# Altium PCB atmg32.PcbDoc
Units mil, origin at the board's own origin, x right, y up, seen from the top; angles counter-clockwise.
Board outline 4460 x 2635 mil, 2 copper layers (Top Layer, Bottom Layer); 28 components, 42 nets, 134 pads, 32 vias.
Unrouted connection lines stored in the file: 2.
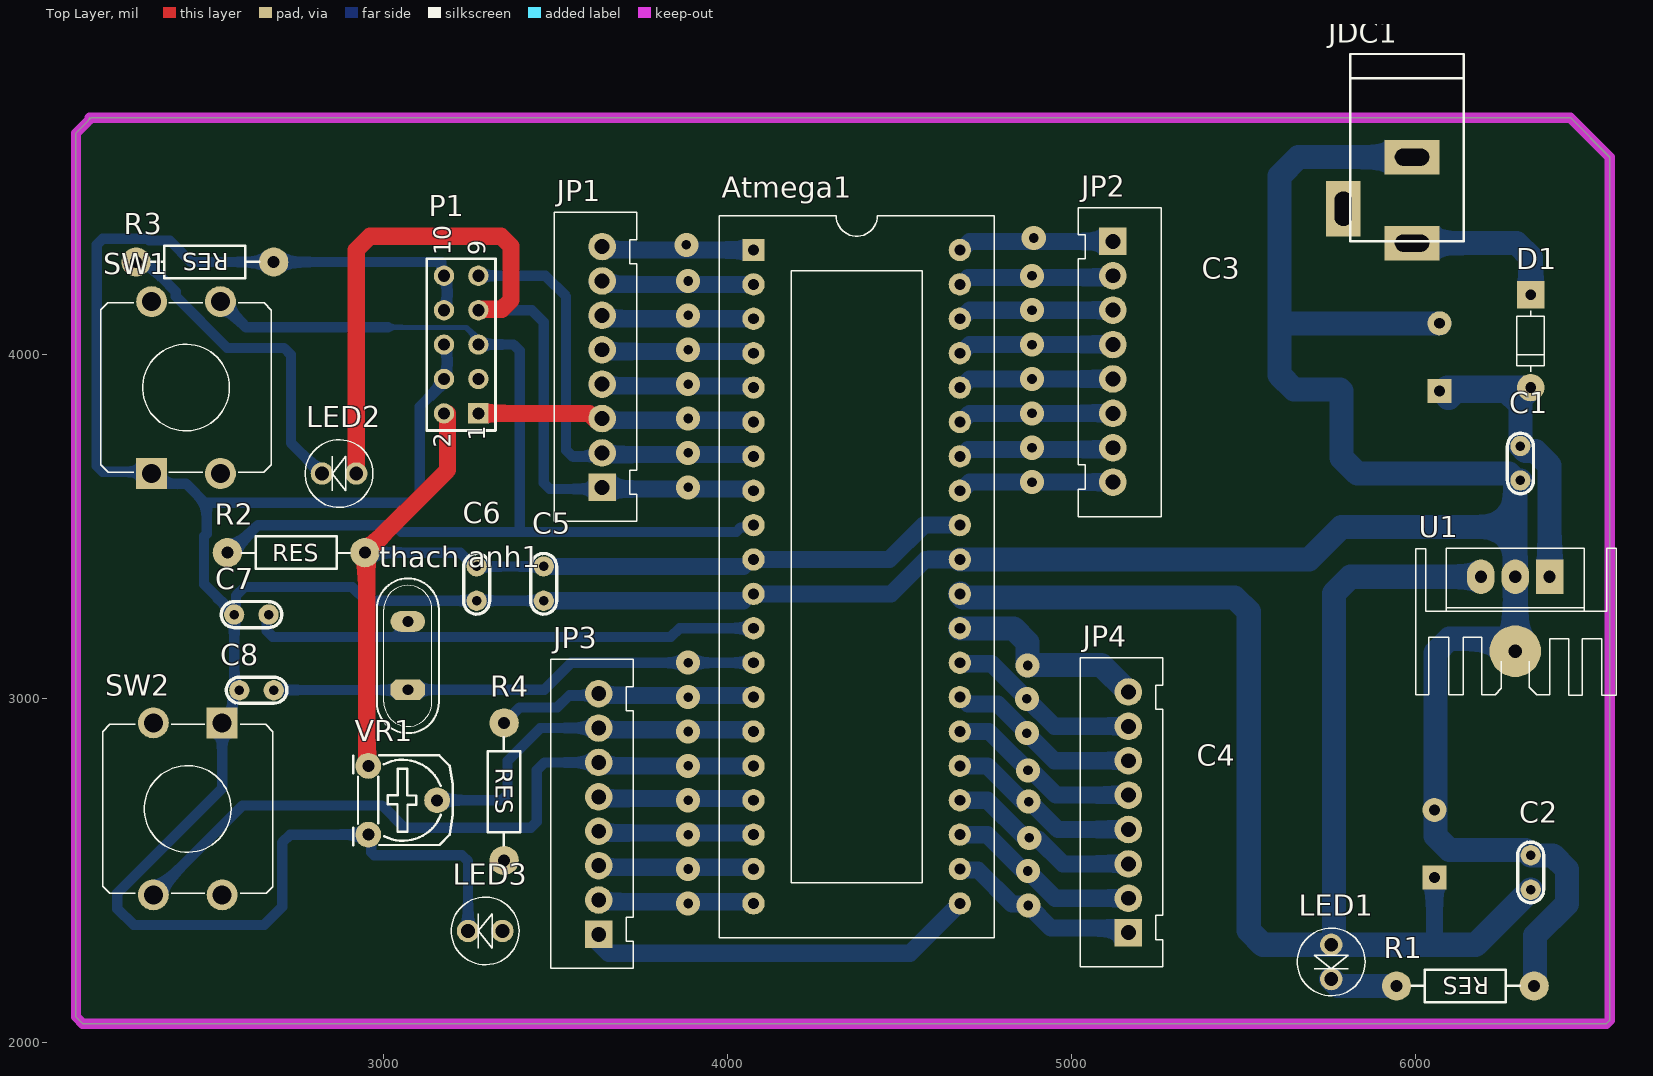
[diagram p0: Top Layer view]
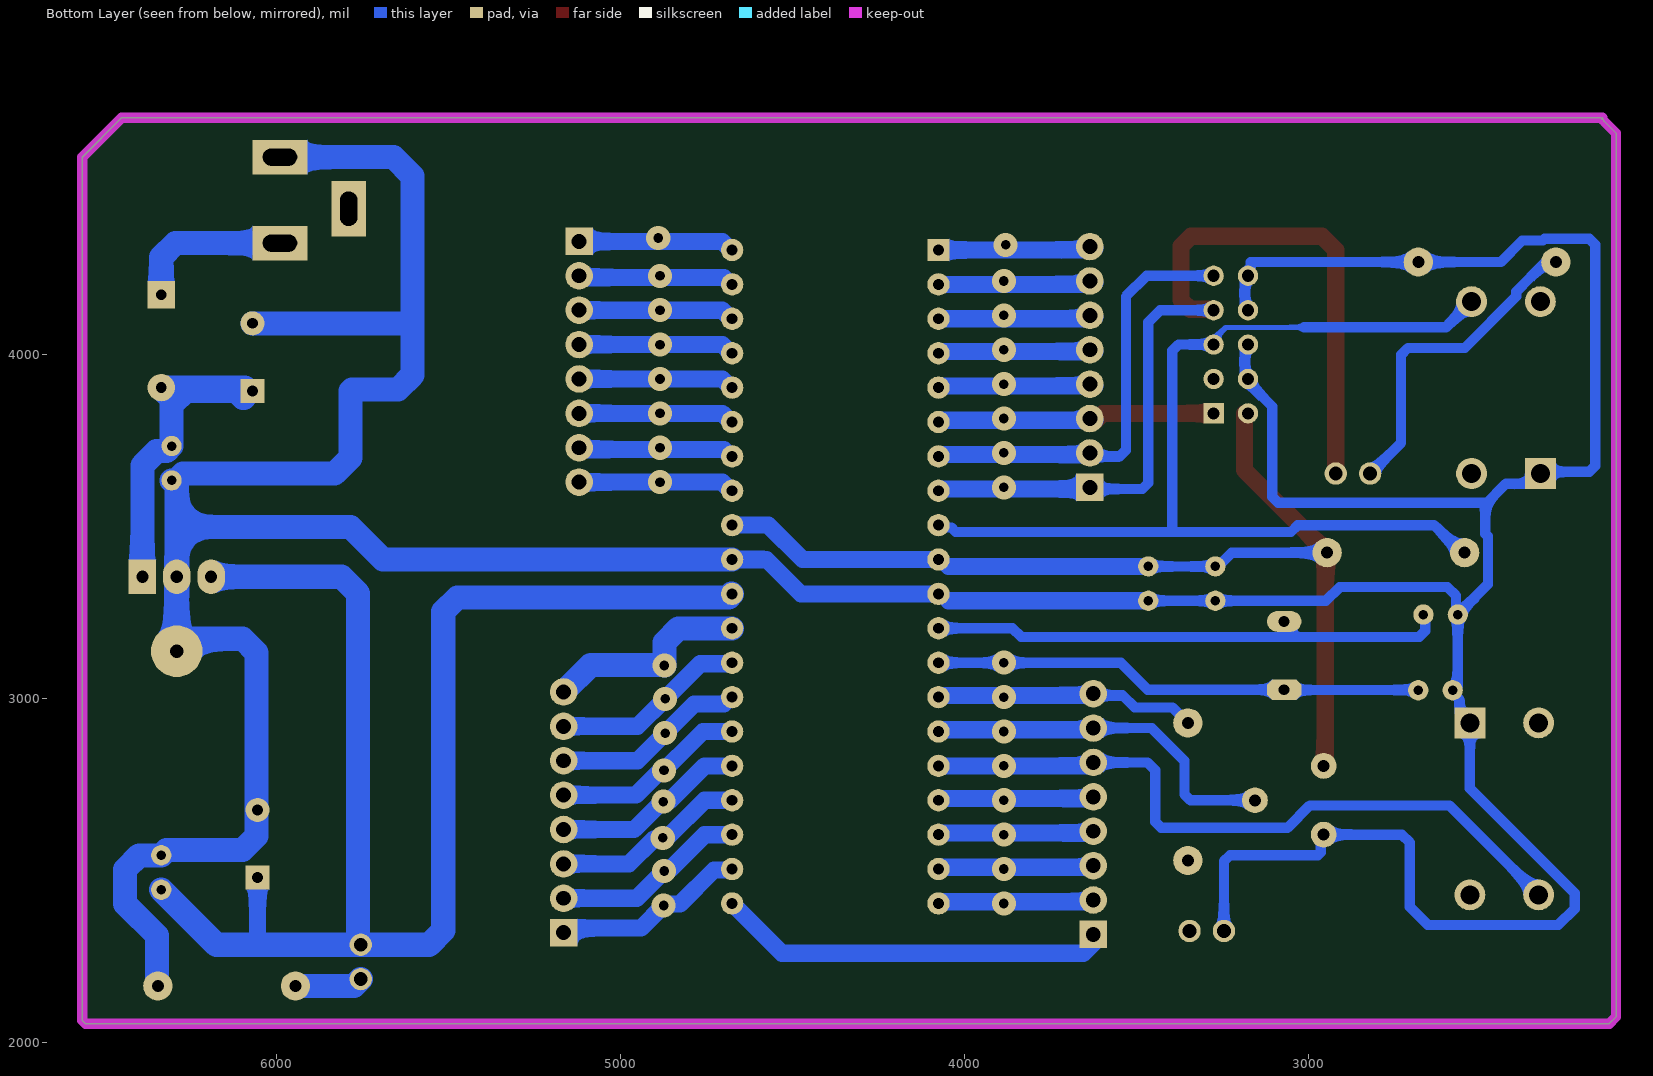
[diagram p1: Bottom Layer view, seen from below]
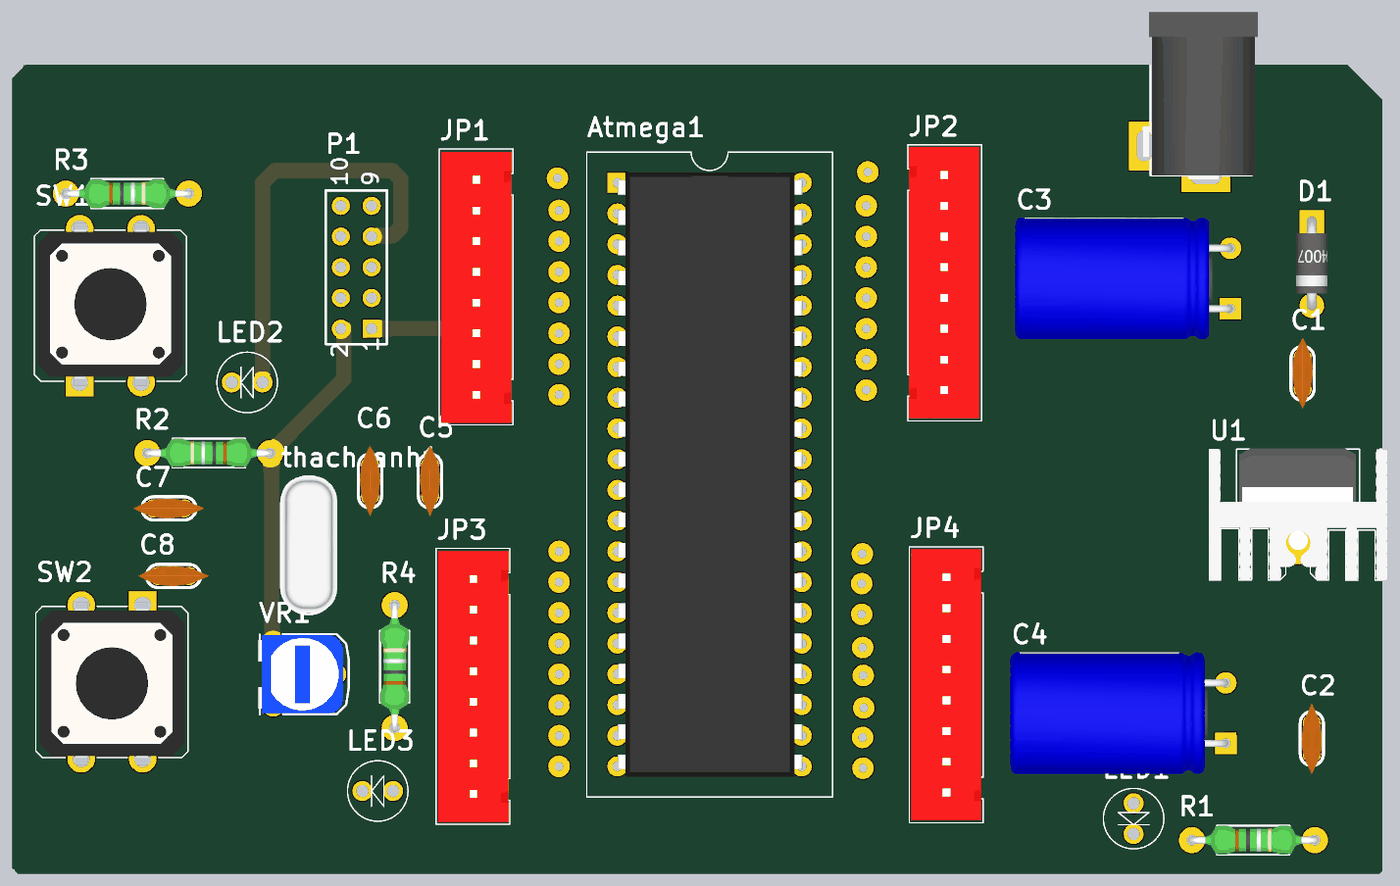
[diagram p2: 3D render of the assembled board from above, using the file's embedded part models]

## Layer stack, top to bottom
Top Solder: solder mask 0.4, Solder Resist, Dk 3.5
Top Layer: signal copper 1.4
Dielectric 1: dielectric 12.6, FR-4, Dk 4.8
Bottom Layer: signal copper 1.4
Bottom Solder: solder mask 0.4, Solder Resist, Dk 3.5

## Board outline
2105,2075 2125,2055 6555,2055 6565,2065 6565,4575 6450,4690 2150,4690 2145,4685 2145,4690 2140,4680 2105,4645

## Design rules (kind name [scope] priority, off if disabled: settings)
Clearance [All] p1: gap=10 ignorepadtopadclearanceinfootprint=FALSE except(0: Arc-Hole Track-Hole SMDPad-Hole THPad-Hole Via-Hole Fill-Hole Poly-Hole Region-Hole Text-Hole)
PolygonConnect [All] p1: connectstyle=Relief reliefconductorwidth=10 reliefentries=4 polygonreliefangle="90 Angle" airgapwidth=10
RoutingVias [All] p1: holewidth=28 width=50 viastyle="Through Hole" minholewidth=28 minwidth=50 maxholewidth=28 maxwidth=50
SolderMaskExpansion [All] p1: expansion=4 istentingtop=FALSE
Width [All] p1: maxlimit=70 minlimit=15 preferedwidth=50 toplayer_minwidth=30 bottomlayer_prefwidth=30 minimp=50.000000 maximp=50.000000 favimp=50.000000
30 further rules are at their usual default settings.

## Components (designator, comment, footprint, x,y, rotation, side; value= is the part's Value field where it differs from the comment)
Atmega1 "ATMEGA32A-PU" "DIP 40" 4075,4305 r270 top
C1 "104" CN0 6305,3685 r90 top value=33pF
C2 "104" CN0 6335,2495 r270 top value=33pF
C3 "1000uF/16V" "CAP 10x16x5 CURVE" 6070,3993.43 r90 top
C4 "1000uF/16V" "CAP 10x16x5 CURVE" 6055,2578.43 r90 top
C5 "104" CN0 3465,3335 r90 top value=33pF
C6 "103" CN0 3270,3335 r90 top value=33pF
C7 "22pF" CN0 2615,3245 r180 top value=33pF
C8 "22pF" CN0 2630,3025 r180 top value=33pF
D1 "1N4007" 1N4007 6335,4175 r270 top value=1N4148
JDC1 "INPUT" DC-IN 5890,4450 r270 top value="Jac DC"
JP1 "JP8" XH2.54-8P 3635,3615 r90 top value="Connector 8"
JP2 "JP8" XH2.54-8P 5120,4330 r270 top value="Connector 8"
JP3 "JP8" XH2.54-8P 3625,2315 r90 top value="Connector 8"
JP4 "JP8" XH2.54-8P 5165,2320 r90 top value="Connector 8"
LED1 "LED" LED-5MM-WHITE 5755,2285 r270 top value="LED 3 ly Single Colour"
LED2 "LED" LED-5MM-WHITE 2920,3655 r180 top value="LED 3 ly Single Colour"
LED3 "LED" LED-5MM-WHITE 3345,2325 r180 top value="LED 3 ly Single Colour"
P1 "Header 5X2" HDR2X5 3275,3830 r90 top
R1 "220" RES-1/4W 6130,2170 r180 top
R2 "1k" RES-1/4W 2760,3420 r0 top
R3 "220" RES-1/4W 2465,4275 r180 top
R4 "220" RES-1/4W 3345,2715 r270 top
SW1 "SW" "BUTTON 12x12x5 4P DIP" 2425,3905 r0 top value="Button chip 4 pin"
SW2 "SW" "BUTTON 12x12x5 4P DIP" 2430,2680 r180 top value="Button chip 4 pin"
"thach anh1" "8MHz" "CRYSTAL DIP" 3070,3125 r90 top
U1 "LM7805" "TO 220+Heatsink 21x15x10mm" 6290,3355 r180 top
VR1 "10K" VR-RM065 2955,2805 r270 top value="VR 10K"

## Footprints (in the part's own frame and the unit in brackets; to place one, negate y for a bottom-side part, rotate by r counter-clockwise, add the part's x,y. Pads: shape width x height; smd on the part's side, far side on the other; paste and mask are expansions set on the pad)
1N4007 [mil]
  rect 80x80 hole 31.5: 1(0,0)
  round 80 hole 31.5: 2(270,0)
  silkscreen extent 46,-40 224,40, body extent -22,-52 286,52, height 112
"BUTTON 12x12x5 4P DIP" [mil] "Nut nhan 4 chan 12x12x5mm"
  round 90 hole 55.12: 1(-100,250) 2(100,250) 4(100,-250)
  rect 90x90 hole 55.12: 3(-100,-250)
  silkscreen extent -248,-246 248,246, body extent -236,-260 236,270, height 157
"CAP 10x16x5 CURVE" [mil] "D=12.5; H = 25; Pitch = 5 (MM)"
  rect 70x70 hole 31.5 rot 0.18: 1(-98.43,0)
  round 70 hole 31.5: 2(98.43,0)
  body extent -198,-8 198,701, height 395
CN0 [mm] "Tu gom mini"
  round 1.5 hole 0.7: 1(-1.27,0) 2(1.27,0)
  silkscreen extent -2.25,-0.97 2.22,0.97, body extent -2.92,-0.85 2.92,0.85, height 6.12
"CRYSTAL DIP" [mm]
  oct 1.524x2.54 hole 0.8: 1(-2.5,0)
  oval 1.524x2.54 hole 0.8: 2(2.54,0)
  silkscreen extent -5.71,-2.29 5.71,2.29, body extent -5.63,-2.35 5.72,2.3, height 3.5
DC-IN [mil] "Jac DC input"
  rect 100x160 hole 50 slot 100 at 90 deg: 1(125,100) 2(-125,100)
  rect 160x100 hole 50 slot 100 at 0 deg: 3(25,-100)
  silkscreen extent -425,-80 120,250, body extent -410,-105 134,269, height 434
"DIP 40" [mil]
  rect 65x65 hole 31.5: 1(0,0)
  round 65 hole 31.5: 2(100,0) 3(200,0) 4(300,0) 5(400,0) 6(500,0) 7(600,0) 8(700,0) 9(800,0) 10(900,0) 11(1000,0) 12(1100,0) 13(1200,0) 14(1300,0) 15(1400,0) 16(1500,0) 17(1600,0) 18(1700,0) 19(1800,0) 20(1900,0) 21(1900,600) 22(1800,600) 23(1700,600) 24(1600,600) 25(1500,600) 26(1400,600) 27(1300,600) 28(1200,600) 29(1100,600) 30(1000,600) 31(900,600) 32(800,600) 33(700,600) 34(600,600) 35(500,600) 36(400,600) 37(300,600) 38(200,600) 39(100,600) 40(0,600)
  silkscreen extent -100,-100 2000,700, body extent -34,0 1934,602, height 227
HDR2X5 [mm] "Connector; Header; 5x2 Position"
  rect 1.5x1.5 hole 0.9: 1(0,0)
  round 1.5 hole 0.9: 2(0,2.54) 3(2.54,0) 4(2.54,2.54) 5(5.08,0) 6(5.08,2.54) 7(7.62,0) 8(7.62,2.54) 9(10.16,0) 10(10.16,2.54)
  silkscreen extent -1.27,-1.27 11.43,3.81
LED-5MM-WHITE [mil]
  round 65 hole 40: 1(0,0) 2(100,0)
  silkscreen extent -48,-98 148,98, body extent -54,-105 155,105, height 370
RES-1/4W [mil]
  round 85 hole 35: 1(-215,5) 2(185,5)
  silkscreen extent -173,-42 141,52, body extent -227,-42 197,52, height 95
"TO 220+Heatsink 21x15x10mm" [mm] "+ tan nhiet 21x15x10mm"
  rect 2.032x2.54 hole 0.9: 1(-2.54,0)
  round 3.81 hole 1: 2(0,5.5)
  oval 2.032x2.54 hole 0.9: 2(0,0) 3(2.54,0)
  silkscreen extent -7.44,-2.11 7.34,8.74, body extent -7.42,-2.16 7.37,8.72, height 25
VR-RM065 [mil] "Bien Tro Tam Giac Dung"
  round 75 hole 35: 1(0,0) 2(100,200) 3(200,0)
  silkscreen extent -31,-44 231,246, body extent -28,-50 228,228, height 279
XH2.54-8P [mil]
  rect 80x80 hole 43.31: 1(0,0)
  round 80 hole 43.31: 2(100,0) 3(200,0) 4(300,0) 5(400,0) 6(500,0) 7(600,0) 8(700,0)
  silkscreen extent -98,-100 800,140, body extent -91,-95 791,134, height 273

## Part data
Atmega1: "8-Bit AVR Microcontroller with 32K Bytes of In-System Programmable Flash Memory", ComponentLink1Description="Manufacturer Link", ComponentLink1URL=http://www.atmel.com, ComponentLink2Description=Datasheet, ComponentLink2URL=http://www.atmel.com/dyn/resources/prod_documents/doc2503.pdf, DatasheetVersion=2503C-AVR-10/02, LatestRevisionDate=04-Mar-2005, LatestRevisionNote="Stylized 3D Model Added.", PackageDescription="DIP; 40 Leads; Row Spacing 15.24 mm; Pitch 2.54 mm", PackageReference=40P6, PackageVersion=Dec-1999, Published=17-Sep-2003, Publisher="Altium Limited"
C1 C2 C5 C6 C7 C8: library part CN0, "Ceramic capacitor"
C3 C4: library part "CAP 10x16mm"
D1: "Diode 1N4007 1A 1000V"
JDC1: library part DCIN, "Jac DC input"
JP1 JP2 JP3 JP4: library part Con8, "Header duc 8, Connector 8, Header 8"
LED1 LED2 LED3: "LED Single"
P1: "Header, 5-Pin, Dual row", LatestRevisionDate=17-Jul-2002, LatestRevisionNote="Re-released for DXP Platform.", Publisher="Altium Limited"
R1 R2 R3 R4: library part Res1/4W, "Tro cam"
SW1 SW2: library part "SW4 12x12", "Switch button 4 pin 12x12mm"
"thach anh1": library part Crystal, "Thach anh", LatestRevisionDate=17-Jul-2002, LatestRevisionNote="Re-released for DXP Platform.", PackageReference=R38, Published=8-Jun-2000, Publisher="Altium Limited"
U1: library part LM78xx, "On ap +, from + 5 to + 24VDC"
VR1: library part VR, "Var Resistor"

## Via types
v1: diameter 70, hole 28, Top Layer to Bottom Layer, 32 vias

## Nets (pads, with @x,y where several pads share a name; then routed paths per layer and width w, separated by ;. In a path a pad name is that pad's centre, name@x,y a point inside that pad or via, vN(x,y) a via of type N, cw(c..) or ccw(c..) an arc to the next point about the centre after c; other vN are vias at no path point)
AREF: Atmega1.10 Atmega1.30 Atmega1.32 C2.2 C4.1 C5.2 C6.2 LED1.1 P1.2 R2.2 U1.3 VR1.1 | length 7286.3
  Top Layer w50: VR1.1 2950.22,2809.78 2950.22,3419.78 R2.2 3185,3665 P1.2@3185,3830
  Bottom Layer w30: R2.2 3222.14,3425 3262.14,3385 C6.2 C5.2 ; 4045.53,3385 4065.53,3405 Atmega1.10
  Bottom Layer w50: C5.2 4045.53,3385 ; Atmega1.10 4470,3405 4570,3505 Atmega1.32 ; 6055,2285 C4.1
  Bottom Layer w70: Atmega1.30@4676.36,3306.36 Atmega1.30 4685,3295 5473.99,3295 5515,3253.99 5515,2326.01 5556.01,2285 LED1.1 ; U1.3 5811.01,3355 5762.36,3306.36 5762.36,2292.36 LED1.1 ; C2.2 6175,2285 6055,2285 LED1.1
Bien_tro_1: Atmega1.15 JP3.7 VR1.2 | length 1071.1
  Bottom Layer w30: VR1.2 3342.43,2705 3360,2722.57 3360,2820 3455,2915 JP3.7
  Bottom Layer w50: JP3.7@3620,2910 4065.94,2910 4070.94,2905 Atmega1.15
  other v1: 3885,2905
Button_1: Atmega1.16 JP3.6 SW2.2 | length 2049.7
  Bottom Layer w30: SW2.2 2590,2690 2995,2690 3060,2625 3427.43,2625 3445,2642.57 3445,2792.43 3467.57,2815 JP3.6
  Bottom Layer w50: JP3.6@3622.66,2808.12 3624.55,2808.12 3627.66,2805 v1(3885,2805) Atmega1.16
GND: Atmega1.11 Atmega1.31 C1.1 C2.1 C3.2 C4.2 C5.1 C6.1 C7.2 C8.2 JDC1.2 LED3.2 P1.4 P1.6 P1.8 P1.10 R1.1 R3.1 SW1.3 SW2.3 U1.2 VR1.3 | length 14500.5
  Bottom Layer w30: P1.6@3185,4030 3185,3930 3105,3850 3105,3587.57 3087.43,3570 2490,3570 2485,3565 ; P1.8@3185,4130 3185,4238.93 3167.43,4256.5 3167.43,4270 R3.1 2440,4270 2377.43,4332.57 2317.2,4332.57 2312.27,4337.5 2182.57,4337.5 2165,4319.93 2165,3677.57 2182.57,3660 2320,3660 SW1.3 2355,3625 2425,3625 2485,3565 ; LED3.2 3245,2527.43 3227.43,2545 2972.57,2545 2963.61,2553.96 2963.61,2596.39 VR1.3 2727.57,2605 2705,2582.43 2705,2395 2652.43,2342.43 2272.57,2342.43 2225,2390 2225,2435 2530,2740 SW2.3 2560,2960 2560,2997.14 2580,3017.14 C8.2 cw(c2580,3040) 2565,3040 C7.2 ; C5.1 C6.1 2948.57,3285 2908.57,3325 2595,3325 2570.56,3300.56 2570.56,3250.56 C7.2 ; 4045.53,3285 4065.53,3305 Atmega1.11 ; 2485,3565 2485,3480 2477.5,3472.5 2477.5,3332.5 C7.2
  Bottom Layer w50: C5.1 4045.53,3285 ; Atmega1.11 4475,3305 4575,3405 Atmega1.31 ; 5605,4100 5613.15,4091.85
  Bottom Layer w70: Atmega1.31 5690,3405 5785,3500 6290,3500 ; 5613.15,4091.85 C3.2 ; JDC1.2 5660,4575 5605,4520 5605,4100 5605,3941.01 5646.64,3899.37 5780.35,3899.37 5784.72,3895 5784.72,3701.01 5830.73,3655 6271.86,3655 6291.86,3635 C1.1 6290,3620 6290,3500 ; U1.2@6248.99,3160 6290,3201.01 U1.2@6290,3340 ; U1.2@6248.99,3175 6098.64,3175 6057.64,3133.99 6057.64,2676.85 6057.64,2601.01 6098.64,2560 6320,2560 C2.1 6398.99,2545 6440,2503.99 6440,2404.06 6347.87,2311.93 6347.87,2167.87 R1.1 ; U1.2@6290,3355 6290,3500
Led_1: Atmega1.14 JP3.8 R4.1 | length 767.3
  Bottom Layer w30: R4.1 3395,2975 3505,2975 3540,3010 3620,3010 JP3.8
  Bottom Layer w50: JP3.8@3620,3010 4065.94,3010 4070.94,3005 Atmega1.14
  other v1: 3885,3005
MISO: Atmega1.7 JP1.2 P1.9 | length 1273.7
  Bottom Layer w30: P1.9@3285,4230 3470,4230 3530,4170 3530,3722.57 3547.57,3705 3615,3705 JP1.2@3620,3710
  Bottom Layer w50: JP1.2@3620,3710 4065.94,3710 4070.94,3705 Atmega1.7
  other v1: 3885,3715
MOSI: Atmega1.6 JP1.3 P1.1 | length 803.9
  Top Layer w50: P1.1@3285,3830 3597.34,3830 3617.34,3810 JP1.3@3620,3810
  Bottom Layer w30: P1.1@3285,3830 P1.1@3287.5,3827.5
  Bottom Layer w50: JP1.3@3620,3810 4065.94,3810 4070.94,3805 Atmega1.6
  other v1: 3885,3815
NetAtmega1_1: Atmega1.1 JP1.8 | length 457.1
  Bottom Layer w50: JP1.8@3620,4310 3622.66,4310 3627.66,4305 Atmega1.1
  other v1: 3880,4320
NetAtmega1_2: Atmega1.2 JP1.7 | length 457.1
  Bottom Layer w50: JP1.7@3620,4210 3622.66,4210 3627.66,4205 Atmega1.2
  other v1: 3885,4215
NetAtmega1_3: Atmega1.3 JP1.6 | length 457.1
  Bottom Layer w50: JP1.6@3620,4110 3622.66,4110 3627.66,4105 Atmega1.3
  other v1: 3885,4115
NetAtmega1_4: Atmega1.4 JP1.5 | length 457.1
  Bottom Layer w50: JP1.5@3620,4010 4065.94,4010 4070.94,4005 Atmega1.4
  other v1: 3885,4015
NetAtmega1_5: Atmega1.5 JP1.4 | length 457.1
  Bottom Layer w50: JP1.4@3620,3910 4065.94,3910 4070.94,3905 Atmega1.5
  other v1: 3885,3915
NetAtmega1_17: Atmega1.17 JP3.5 | length 457.1
  Bottom Layer w50: JP3.5@3620,2710 4065.94,2710 4070.94,2705 Atmega1.17
  other v1: 3885,2705
NetAtmega1_18: Atmega1.18 JP3.4 | length 457.1
  Bottom Layer w50: JP3.4@3620,2610 4065.94,2610 4070.94,2605 Atmega1.18
  other v1: 3885,2605
NetAtmega1_19: Atmega1.19 JP3.3 | length 457.1
  Bottom Layer w50: JP3.3@3620,2510 4065.94,2510 4070.94,2505 Atmega1.19
  other v1: 3885,2505
NetAtmega1_20: Atmega1.20 JP3.2 | length 457.1
  Bottom Layer w50: JP3.2@3620,2410 4065.94,2410 4070.94,2405 Atmega1.20
  other v1: 3885,2405
NetAtmega1_21: Atmega1.21 JP3.1 | length 1145
  Bottom Layer w50: JP3.1@3620,2310 3624.92,2305.08 3624.92,2289.29 3654.21,2260 4530,2260 Atmega1.21
NetAtmega1_22: Atmega1.22 JP4.1 | length 566.6
  Bottom Layer w50: Atmega1.22 4677.87,2502.13 4727.87,2502.13 4827.03,2402.97 4870.31,2402.97 v1(4874.14,2399.14) 4875,2398.28 4940,2333.28 5151.72,2333.28 JP4.1
NetAtmega1_23: Atmega1.23 JP4.2 | length 566.6
  Bottom Layer w50: Atmega1.23 4755,2605 4856.91,2503.09 4869.18,2503.09 4952.27,2420 JP4.2
  other v1: 4873.01,2499.27
NetAtmega1_24: Atmega1.24 JP4.3 | length 566.6
  Bottom Layer w50: Atmega1.24 4755,2705 4860.43,2599.57 4873.09,2599.57 4880.75,2591.91 4903.09,2591.91 4975,2520 JP4.3
  other v1: 4876.92,2595.74
NetAtmega1_25: Atmega1.25 JP4.4 | length 561.2
  Bottom Layer w50: Atmega1.25 4755,2805 4855.17,2704.83 v1@4871.17,2704.83 ; v1(4875,2701.01) 4878.99,2701.01 4960,2620 JP4.4
NetAtmega1_26: Atmega1.26 JP4.5 | length 566.6
  Bottom Layer w50: Atmega1.26 4760,2905 4787.63,2877.37 v1(4873.09,2791.91) 4878.5,2791.91 4888.5,2781.91 4893.09,2781.91 4955,2720 JP4.5
NetAtmega1_27: Atmega1.27 JP4.6 | length 566.6
  Bottom Layer w50: Atmega1.27 4679.06,3005 4699.06,2985 4785,2985 4950,2820 JP4.6
  other v1: 4870,2900
NetAtmega1_28: Atmega1.28 JP4.7 | length 566.6
  Bottom Layer w50: Atmega1.28 4677.87,3102.13 4767.87,3102.13 v1(4870,3000) 4950,2920 JP4.7
NetAtmega1_29: Atmega1.29 JP4.8 | length 607.3
  Bottom Layer w70: Atmega1.29 4830.99,3205 4872,3163.99 v1(4872,3097) 4873.73,3098.73 5086.27,3098.73 JP4.8
NetAtmega1_33: Atmega1.33 JP2.8 | length 455.4
  Bottom Layer w50: Atmega1.33 4679.06,3605 4704.06,3630 JP2.8
  other v1: 4885,3630
NetAtmega1_34: Atmega1.34 JP2.7 | length 453.3
  Bottom Layer w50: Atmega1.34 4679.06,3705 4699.06,3725 JP2.7@5120,3725
  other v1: 4885,3730
NetAtmega1_35: Atmega1.35 JP2.6 | length 455.4
  Bottom Layer w50: Atmega1.35 4679.06,3805 4704.06,3830 JP2.6
  other v1: 4885,3830
NetAtmega1_36: Atmega1.36 JP2.5 | length 455.4
  Bottom Layer w50: Atmega1.36 4679.06,3905 4704.06,3930 JP2.5
  other v1: 4885,3930
NetAtmega1_37: Atmega1.37 JP2.4 | length 455.4
  Bottom Layer w50: Atmega1.37 4679.06,4005 4704.06,4030 JP2.4
  other v1: 4885,4030
NetAtmega1_38: Atmega1.38 JP2.3 | length 455.4
  Bottom Layer w50: Atmega1.38 4679.06,4105 4704.06,4130 JP2.3
  other v1: 4885,4130
NetAtmega1_39: Atmega1.39 JP2.2 | length 453.3
  Bottom Layer w50: Atmega1.39 4679.06,4205 4699.06,4225 JP2.2@5120,4225
  other v1: 4885,4230
NetAtmega1_40: Atmega1.40 JP2.1 | length 455.4
  Bottom Layer w50: Atmega1.40 4679.06,4305 4704.06,4330 JP2.1
  other v1: 4890,4340
NetC1_2: C1.2 C3.1 D1.2 U1.1 | length 1113.4
  Bottom Layer w70: C3.1@6082.37,3895 6100,3895 6125,3895 6263.99,3895 6305,3853.99 ; C3.1@6092.37,3905 6125,3905 6263.99,3905 6305,3905 D1.2 6335,3902.29 6305,3872.29 6305,3853.99 ; C3.1@6095,3875 6097.37,3875 6107.37,3885 ; U1.1 6390,3678.99 6348.99,3720 6320,3720 C1.2 6305,3853.99
NetD1_1: D1.1 JDC1.1 | length 471
  Bottom Layer w70: JDC1.1 6293.99,4325 6335,4283.99 D1.1
NetLED1_2: LED1.2 R1.2 | length 198.3
  Bottom Layer w70: LED1.2 5775,2165 R1.2
NetLED2_2: LED2.2 R3.2 | length 952.3
  Bottom Layer w30: R3.2 2290.52,4259.48 2319.52,4259.48 2353.99,4225 2395,4183.99 2395,4170 2545,4020 2710,4020 2730,4000 2730,3745 LED2.2
NetLED3_1: LED3.1 R4.2
Reset: Atmega1.9 P1.5 R2.1 SW1.2 | length 3041.2
  Bottom Layer w15: 3012.43,4080 3240,4080 3285,4035 P1.5@3285,4030
  Bottom Layer w30: SW1.2 2600,4080 3012.43,4080 ; R2.1 2554.07,3425 2634.07,3505 3030,3505 3050,3485 3390,3485 ; P1.5@3285,4030 3377.43,4030 3395,4012.43 3395,3490 3390,3485 ; Atmega1.9 4068.3,3498.3 4038.3,3498.3 4025,3485 3390,3485
SCK: Atmega1.8 JP1.1 LED2.1 P1.7 | length 2672.6
  Top Layer w50: LED2.1 2920,4305 2960,4345 3340.71,4345 3370,4315.71 3370,4159.29 3343.2,4132.49 3287.49,4132.49 P1.7@3285,4130
  Bottom Layer w30: P1.7@3285,4130 3430,4130 3444.99,4115.01 3465,4095 3465,3627.57 3482.57,3610 JP1.1@3620,3610
  Bottom Layer w50: JP1.1@3620,3610 Atmega1.8@4065.94,3610 ; Atmega1.8 4070.94,3605 Atmega1.8@4065.94,3610 ; Atmega1.8@4075,3610 Atmega1.8@4065.94,3610
  other v1: 3885,3615
XTAL1: "thach anh1.1" Atmega1.13 C8.1 | length 1442.6
  Bottom Layer w30: C8.1 2680.79,3025.79 3069.21,3025.79 3070,3026.57 3466.57,3026.57 3545,3105 Atmega1.13 4071.93,3102.08 4062.09,3102.08 Atmega1.13@4061.72,3102.08
  other v1: 3885,3105
XTAL2: "thach anh1.2" Atmega1.12 C7.1 | length 1570.4
  Bottom Layer w30: C7.1 2659.44,3239.44 2659.44,3197.57 2677.01,3180 3032.43,3180 ; 3090,3225 3070,3225 3058.12,3225 3044.26,3211.14 3044.26,3191.83 3032.43,3180 ; Atmega1.12 3860,3205 3835,3180 3032.43,3180
pads on no net: JDC1.3 P1.3 SW1.1 SW1.4 SW2.1 SW2.4

## Keep-outs
Keep-Out Layer:
  lines w30: 2140,4680 2105,4645 2105,2075 2125,2055 6555,2055 6565,2065 6565,4575 6450,4690 2150,4690 2145,4685 2145,4690

## Text inside footprints (layer, text, board x,y; h text height)
P1: Top Overlay "10" at 3195,4290 h50 r90; Top Overlay "9" at 3295,4290 h50 r90; Top Overlay "1" at 3295,3750 h50 r90; Top Overlay "2" at 3195,3730 h50 r90
R1: Top Overlay "RES" at 6214,2190 h50 r180
R2: Top Overlay "RES" at 2676,3400 h50
R3: Top Overlay "RES" at 2549,4295 h50 r180
R4: Top Overlay "RES" at 3325,2799 h50 r270